# Altium PCB 7Inc Module.PcbDoc (part 1 of 2)
Units mm, origin at the board's own origin, x right, y up, seen from the top; angles counter-clockwise.
Board outline 50 x 50 mm, 4 copper layers (L1, L2, L3, L4), stack 1.57 mm thick; 64 components, 58 nets, 230 pads, 121 vias.
Unrouted connection lines stored in the file: 274.
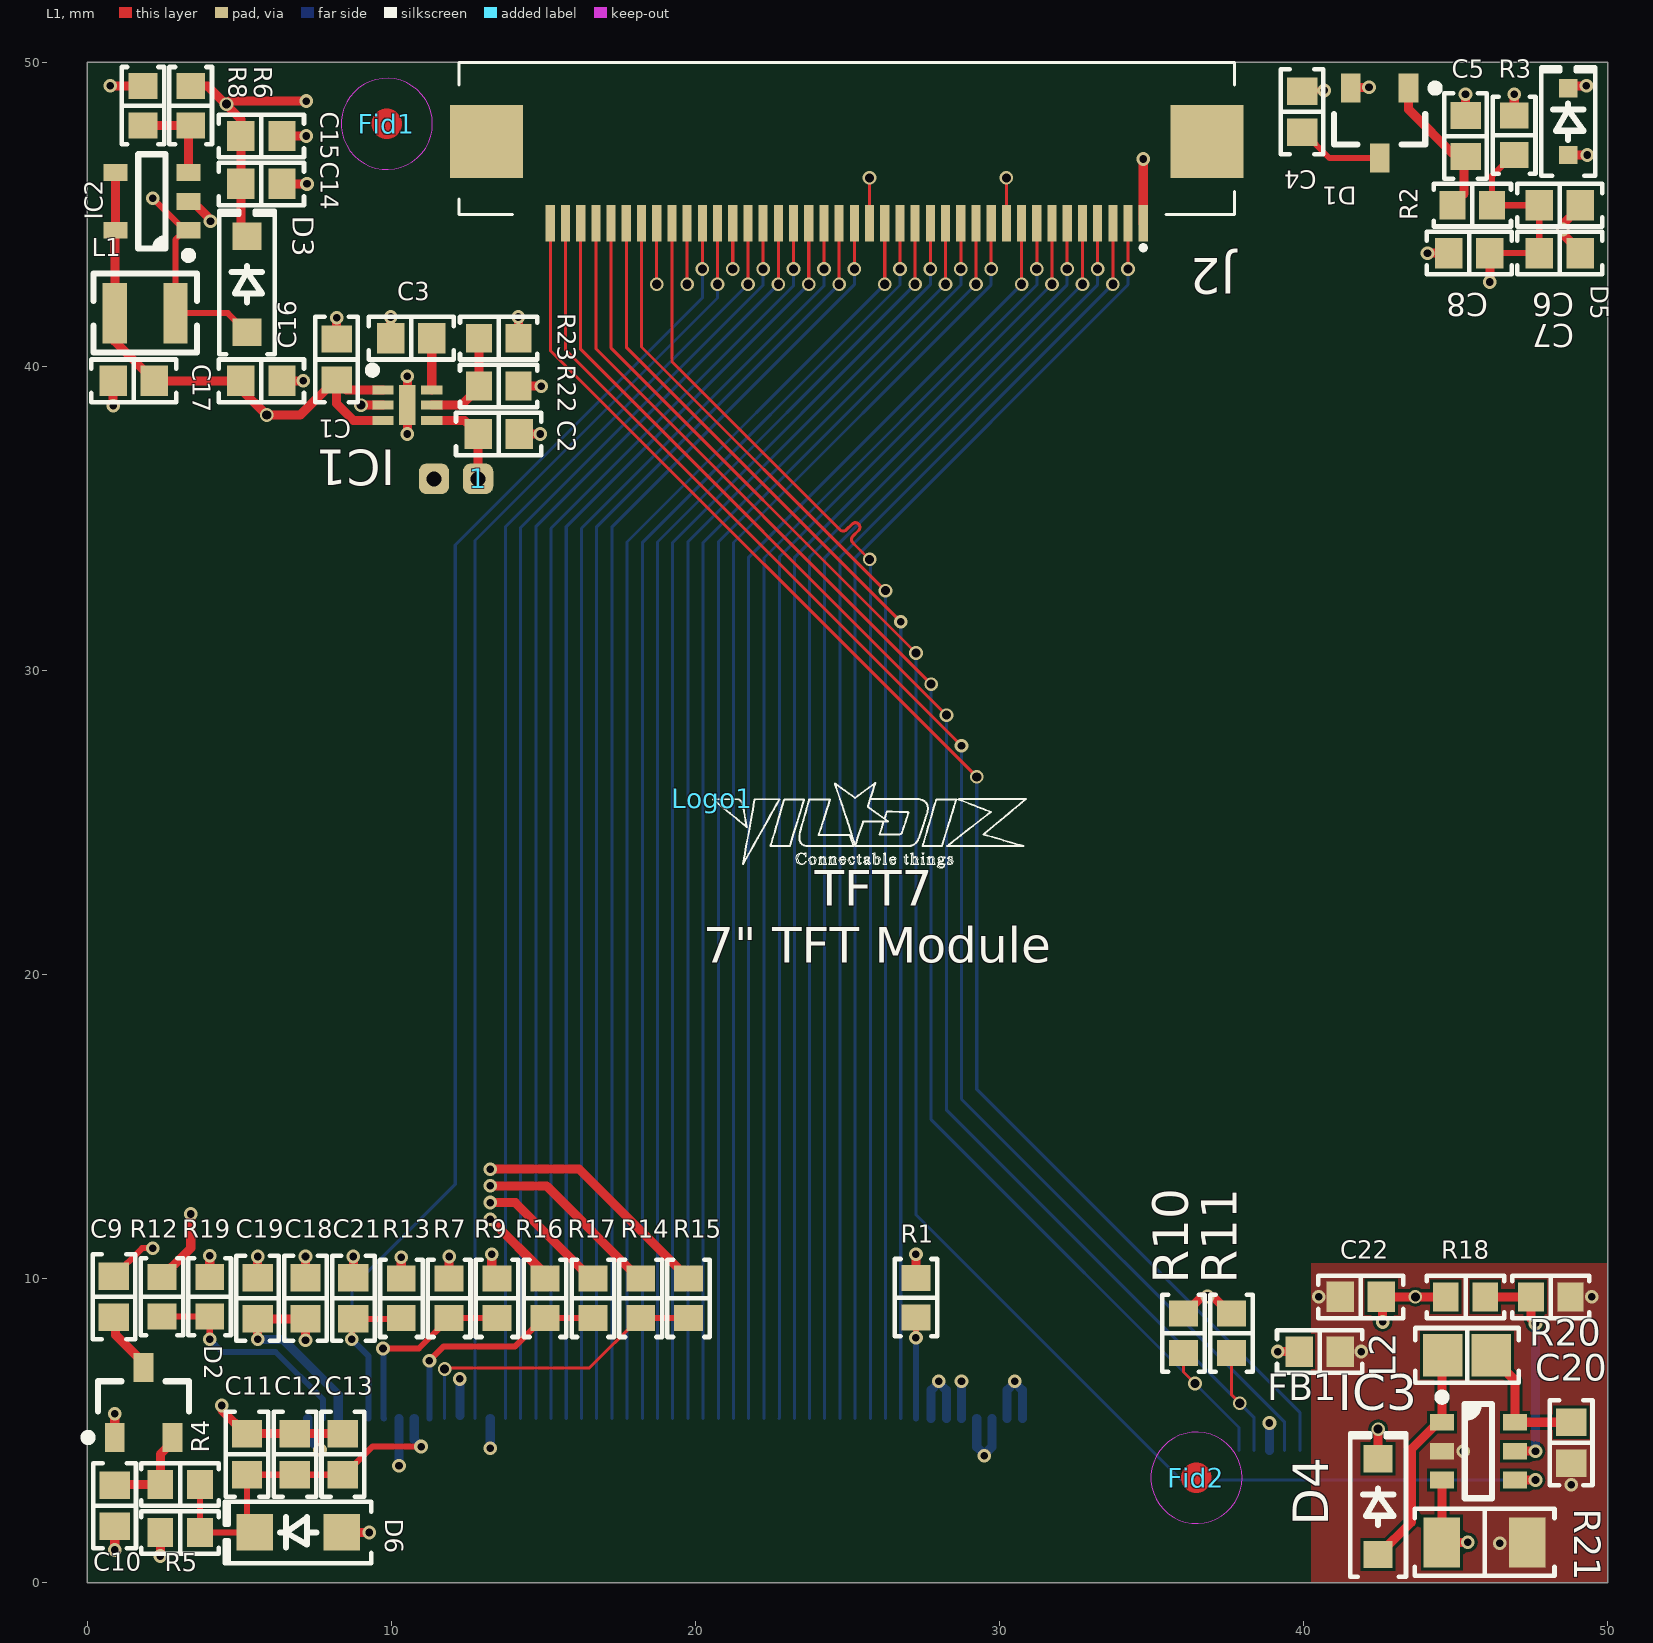
[diagram p0: L1 view]
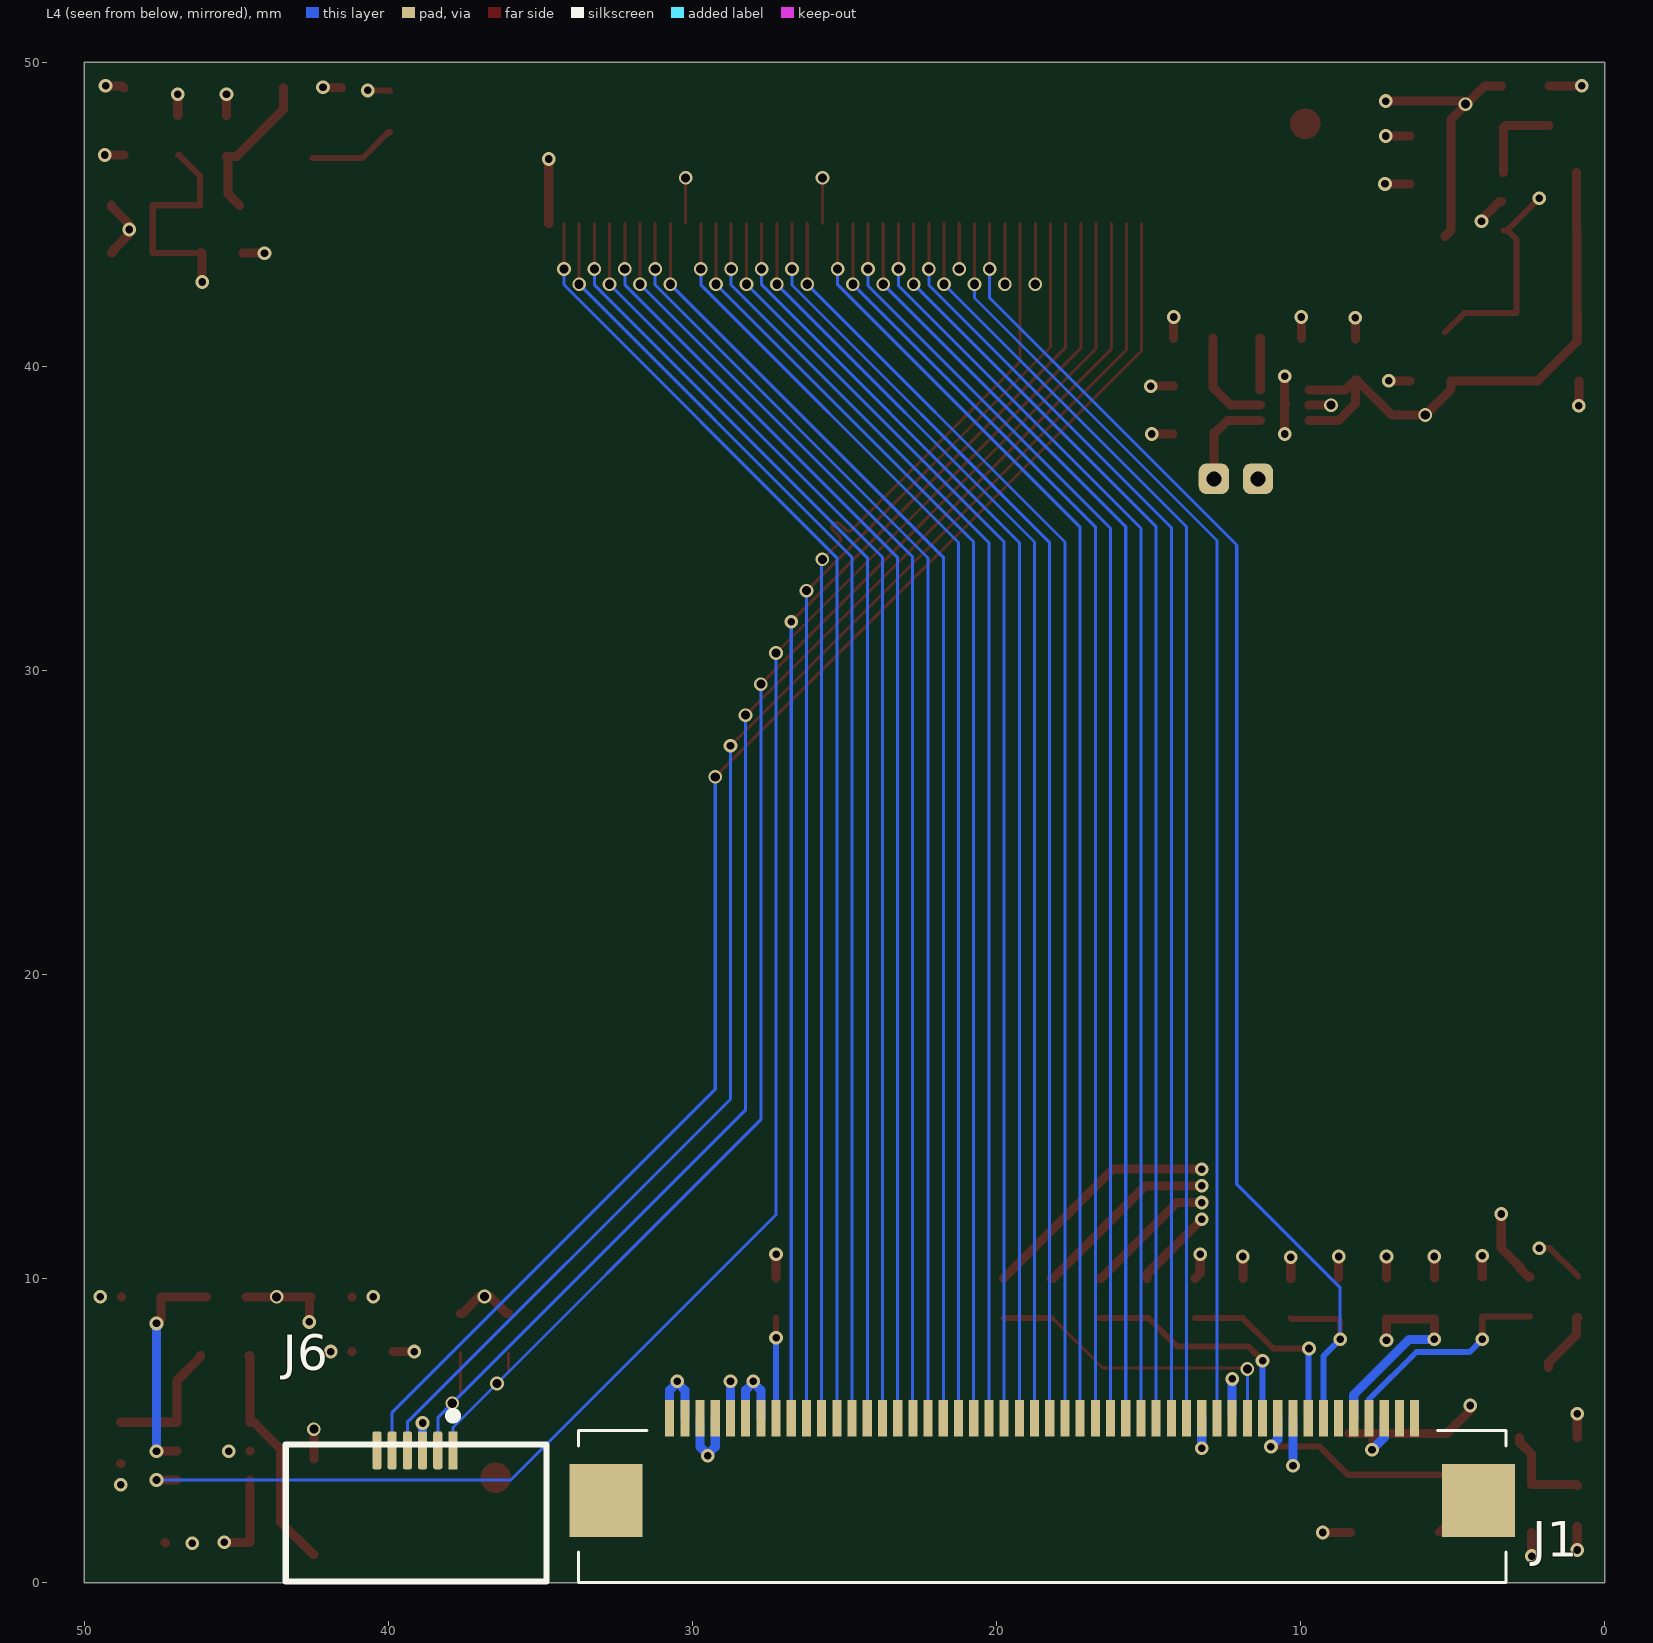
[diagram p1: L4 view, seen from below]
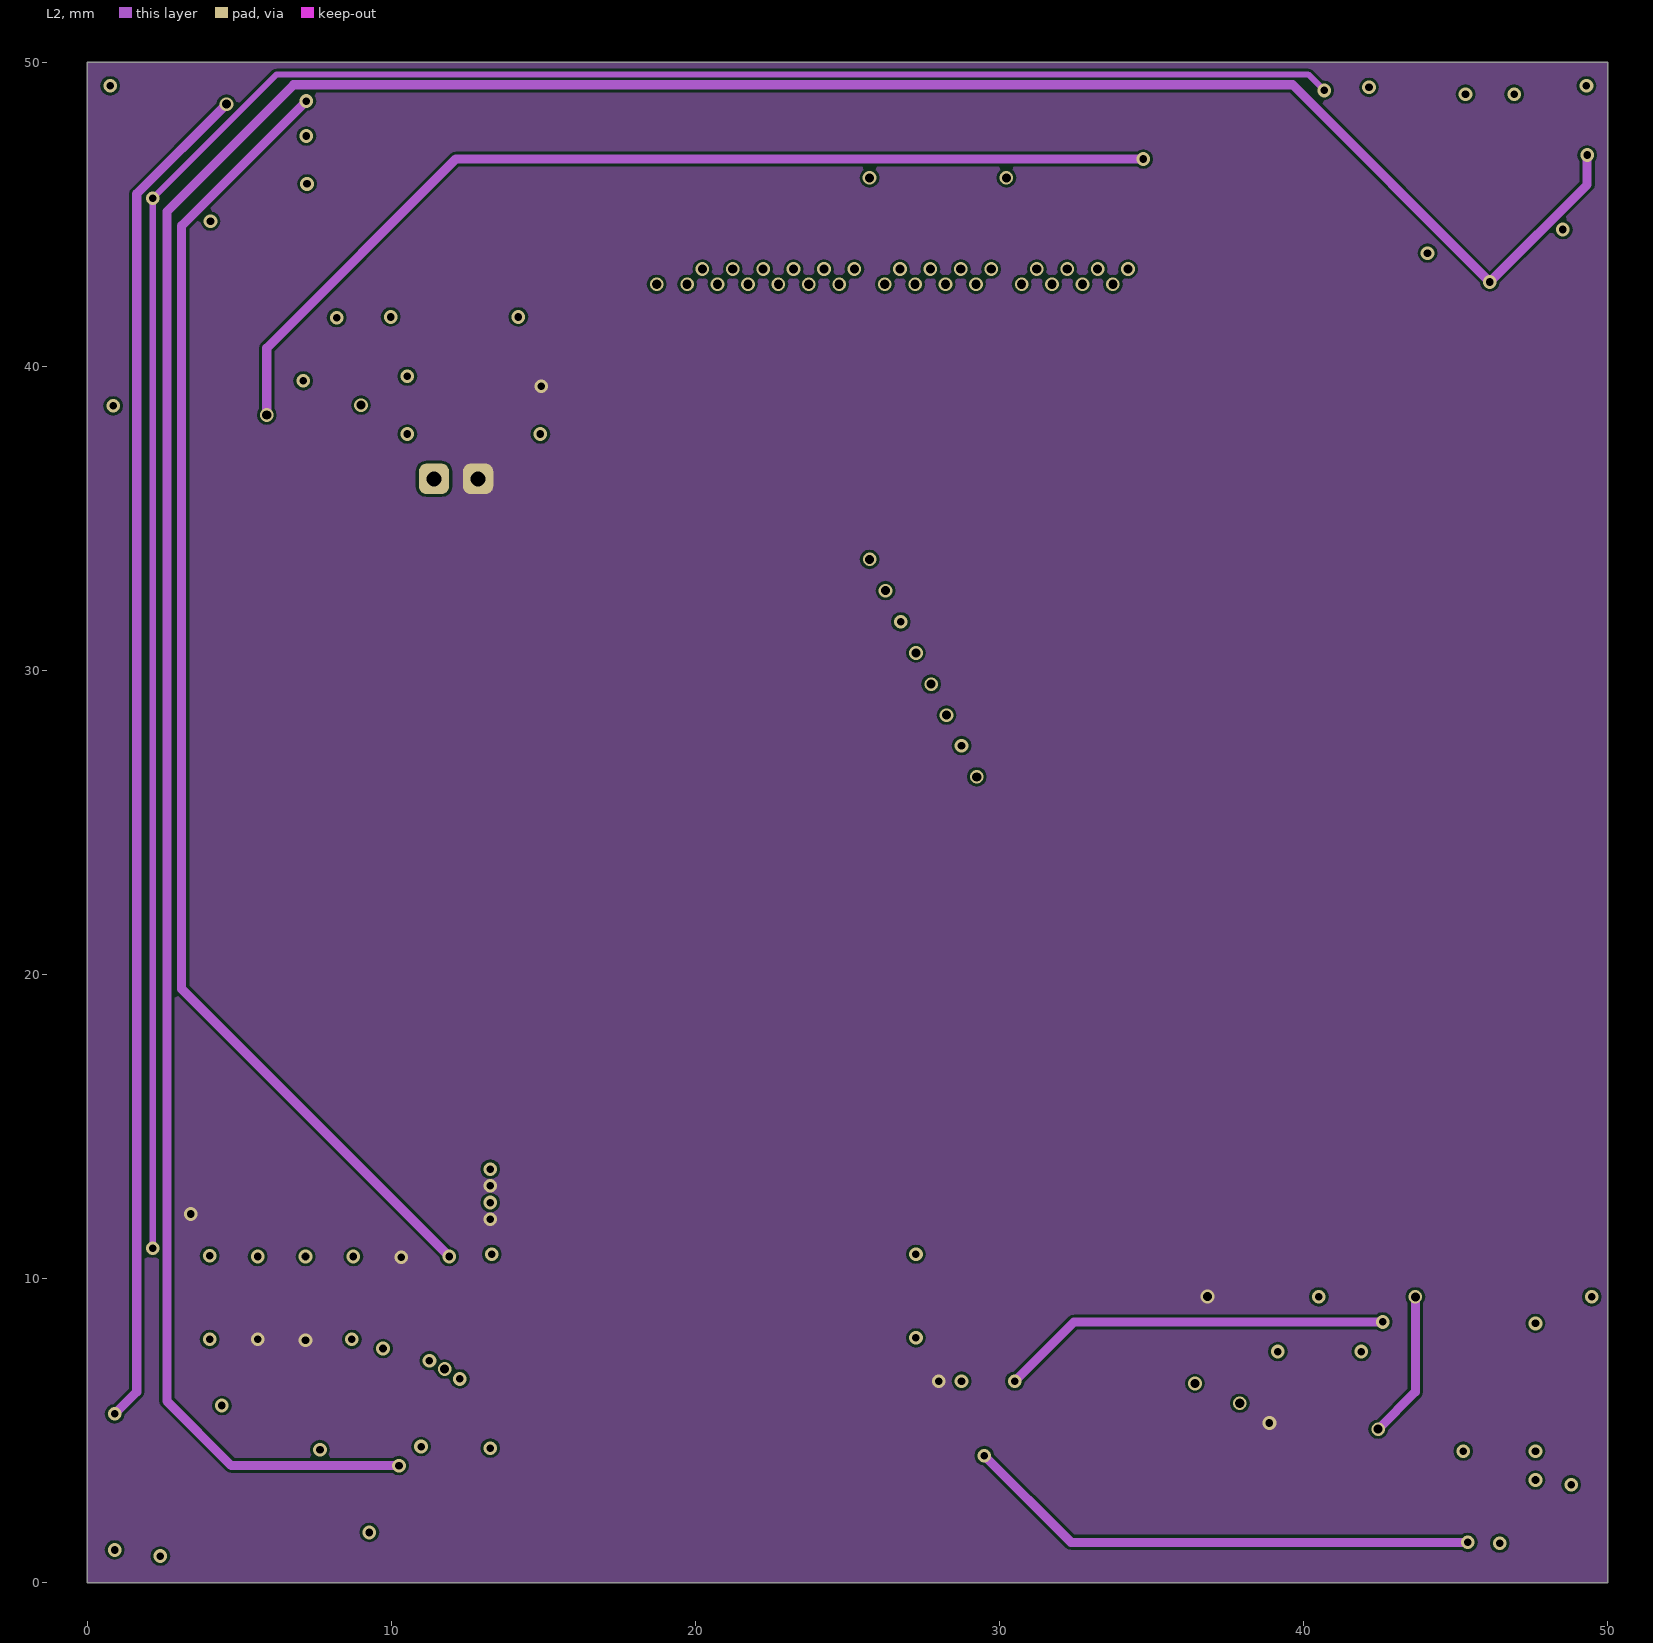
[diagram p2: L2]
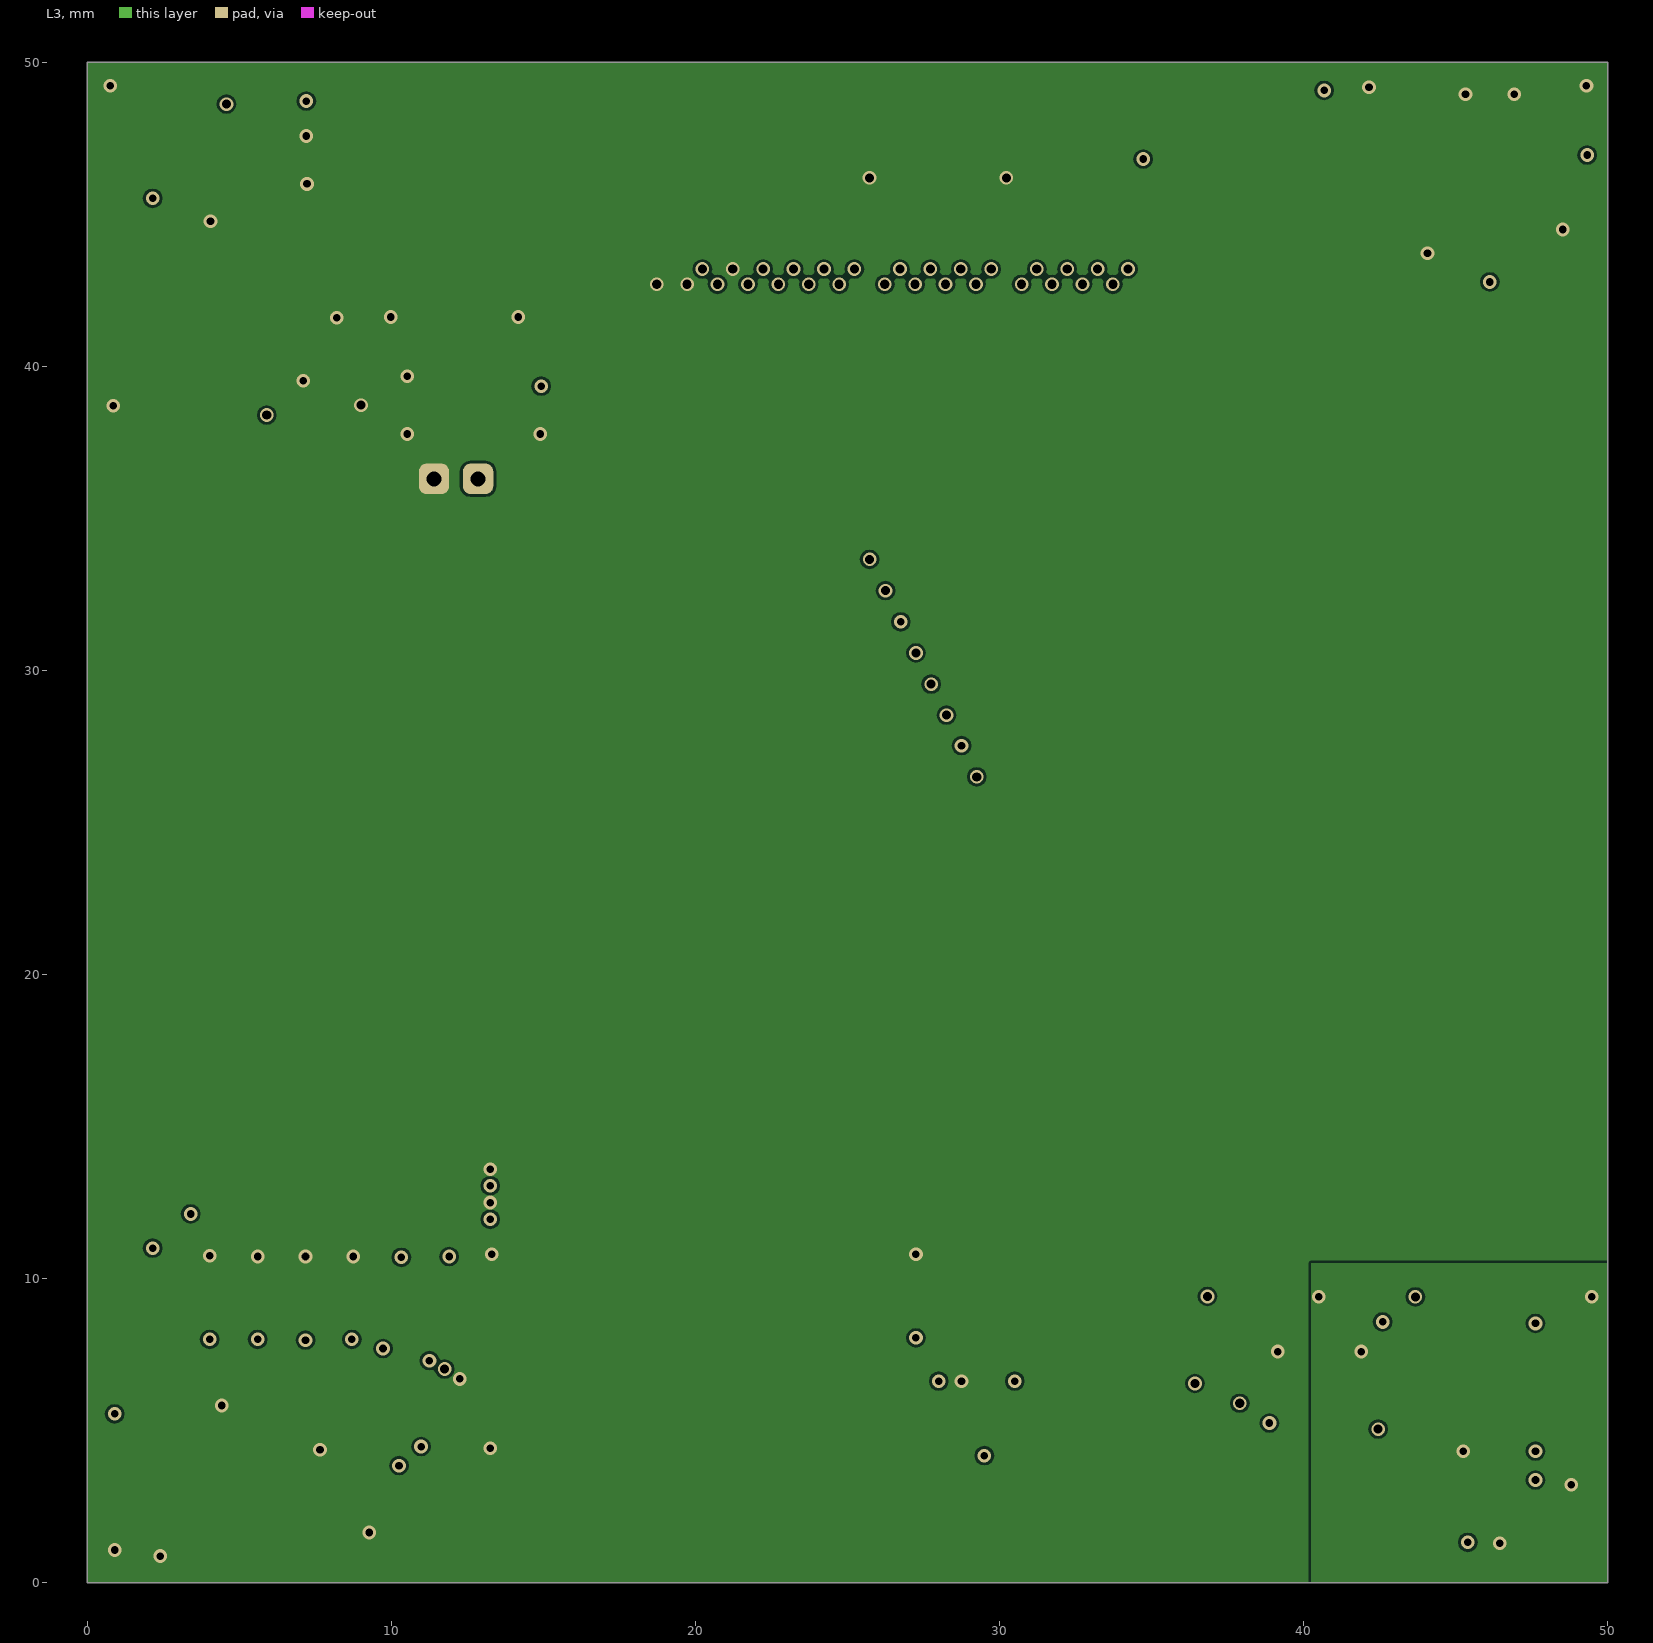
[diagram p3: L3]
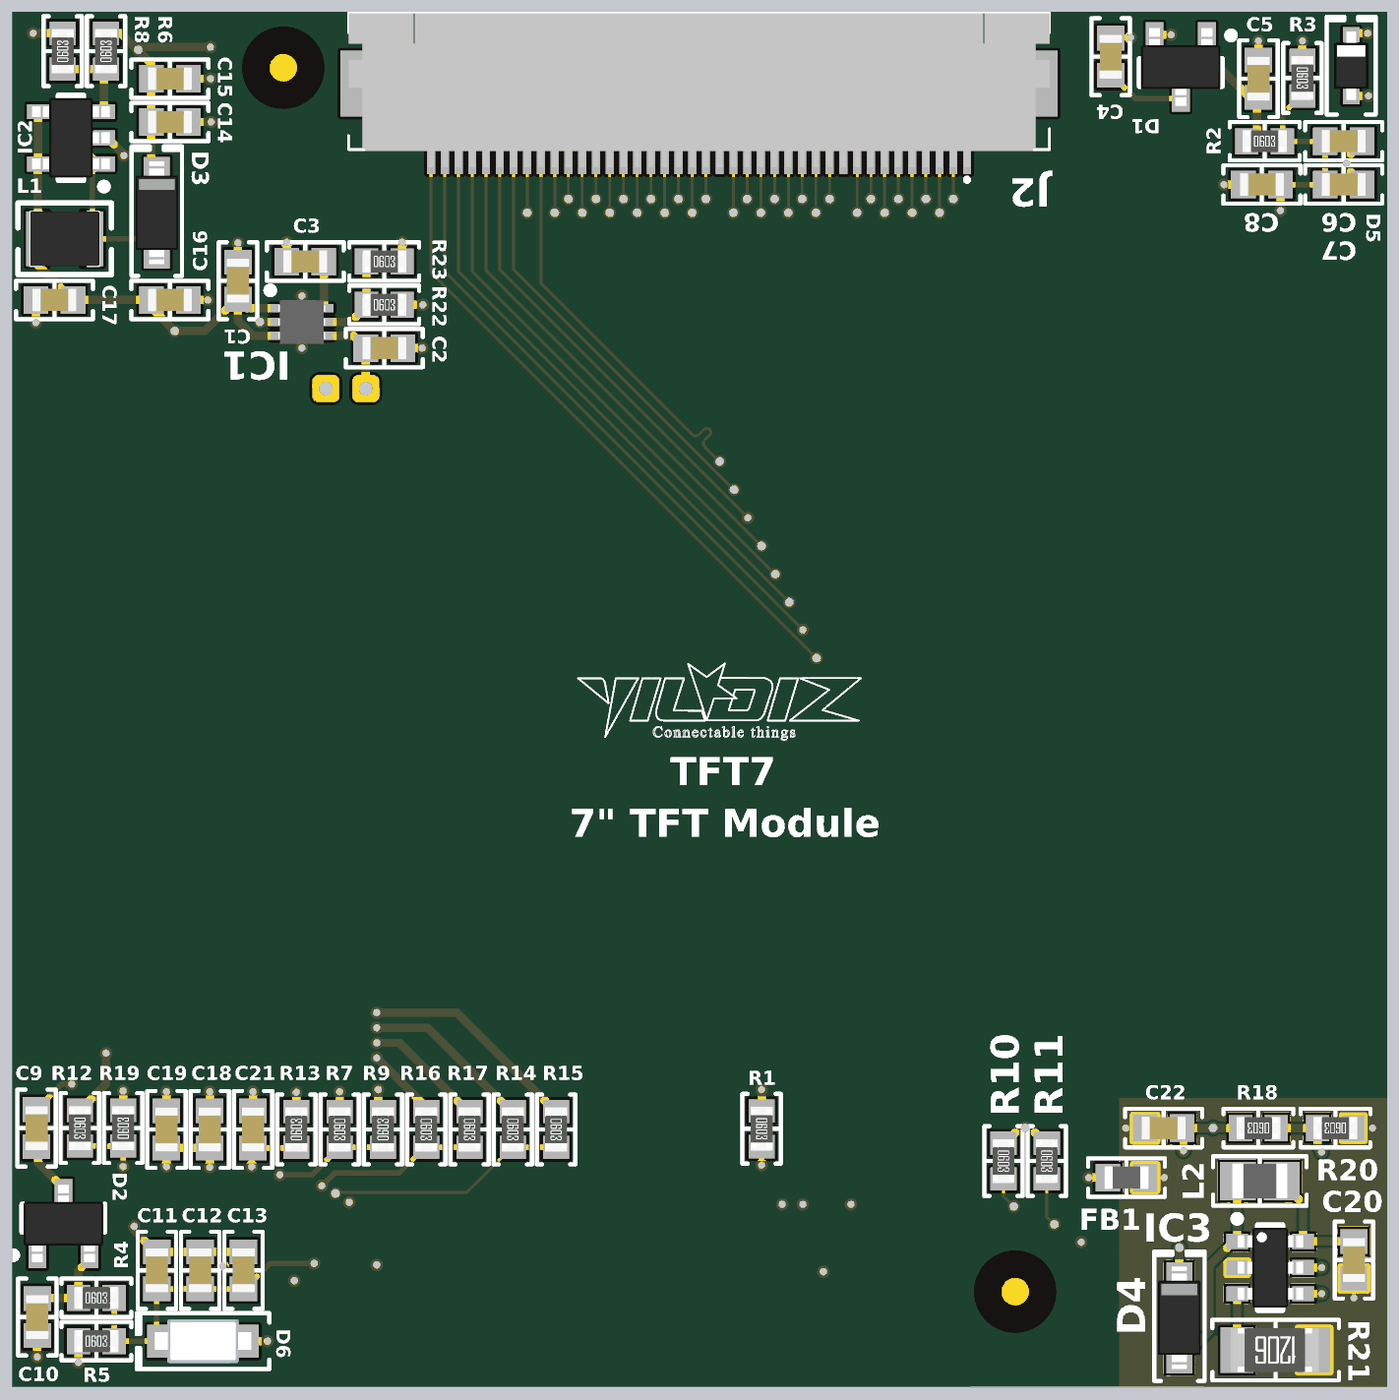
[diagram p4: 3D render of the assembled board from above, using the file's embedded part models]

## Layer stack, top to bottom
Top Solder: solder mask 0.0102, Solder Resist, Dk 3.5
L1: signal copper 0.035
Prepreg 1: prepreg 0.1, 2313, Dk 4.05
L2: signal copper 0.0175
Core: core 1.265, Core-043, Dk 4.3
L3: signal copper 0.0175
Prepreg 2: prepreg 0.1, 2313, Dk 4.05
L4: signal copper 0.035
Bottom Solder: solder mask 0.0102, Solder Resist, Dk 3.5

## Board outline
0,0 0,50 50,50 50,0

## Design rules (kind name [scope] priority, off if disabled: settings)
Clearance [All] p1: gap=0.089 ignorepadtopadclearanceinfootprint=FALSE
ComponentClearance [All] p1: gap=0 collisioncheckmode=3 verticalgap=0 showdistances=FALSE
MatchedLengths "Schematic Matched Net Lengths_3" [InNetClass('LCD_B')] p1: tolerance=2.54 checknetsindiffpair=FALSE checkdiffpairvsdiffpair=TRUE checkxsignals=TRUE checkothers=TRUE
MatchedLengths "Schematic Matched Net Lengths_2" [InNetClass('LCD_CTRL')] p2: tolerance=2.54 checknetsindiffpair=FALSE checkdiffpairvsdiffpair=TRUE checkxsignals=TRUE checkothers=TRUE
MatchedLengths "Schematic Matched Net Lengths_1" [InNetClass('LCD_G')] p3: tolerance=2.54 checknetsindiffpair=FALSE checkdiffpairvsdiffpair=TRUE checkxsignals=TRUE checkothers=TRUE
MatchedLengths "Schematic Matched Net Lengths" [InNetClass('LCD_R')] p4: tolerance=2.54 checknetsindiffpair=FALSE checkdiffpairvsdiffpair=TRUE checkxsignals=TRUE checkothers=TRUE
PolygonConnect [All] p1: connectstyle=Direct reliefconductorwidth=0.254 reliefentries=4 polygonreliefangle="90 Angle" airgapwidth=0.254
RoutingVias [All] p1: holewidth=0.3 width=0.6 viastyle="Through Hole" minholewidth=0.2 minwidth=0.45 maxholewidth=5 maxwidth=5
SolderMaskExpansion [All] p1: expansion=0.102
Width [All] p1: maxlimit=5 minlimit=0.089 preferedwidth=0.2
29 further rules are at their usual default settings.

## Classes and differential pairs
net class R[0..7]: R0 R1 R2 R3 R4 R5 R6 R7
net class LCD_R: R0 R1 R2 R3 R4 R5 R6 R7
net class LCD_G: G0 G1 G2 G3 G4 G5 G6 G7
net class LCD_CTRL: CLK HSYNC VSYNC
net class LCD_B: B0 B1 B2 B3 B4 B5 B6 B7
net class G[0..7]: G0 G1 G2 G3 G4 G5 G6 G7
net class B[0..7]: B0 B1 B2 B3 B4 B5 B6 B7

## Components (designator, comment, footprint, x,y, rotation, side; value= is the part's Value field where it differs from the comment)
1 "Test Point" TestPoint 12.85,36.3 r180 top
C1 "1uF" "CAP 0603/1608" 8.2,40.225 r270 top
C2 "1uF" "CAP 0603/1608" 13.525,37.775 r180 top
C3 "100nF" "CAP 0603/1608" 10.65,40.925 r0 top
C4 "100nF" "CAP 0603/1608" 39.95,48.375 r90 top
C5 "100nF" "CAP 0603/1608" 45.325,47.575 r270 top
C6 "10uF" "CAP 0603/1608" 48.425,45.3 r180 top
C7 "1uF" "CAP 0603/1608" 48.425,43.725 r180 top
C8 "100nF" "CAP 0603/1608" 45.45,43.725 r0 top
C9 "100nF" "CAP 0603/1608" 0.875,9.4 r90 top
C10 "100nF" "CAP 0603/1608" 0.9,2.525 r90 top
C11 "10uF" "CAP 0603/1608" 5.25,4.225 r270 top
C12 "1uF" "CAP 0603/1608" 6.825,4.225 r270 top
C13 "100nF" "CAP 0603/1608" 8.4,4.225 r270 top
C14 "1uF" "CAP 0603/1608" 5.725,46 r180 top
C15 "10uF" "CAP 0603/1608" 5.725,47.575 r180 top
C16 "10uF" "CAP 0603/1608" 5.725,39.525 r180 top
C17 "1uF" "CAP 0603/1608" 1.525,39.525 r0 top
C18 "10uF" "CAP 0603/1608" 7.175,9.35 r270 top
C19 "1uF" "CAP 0603/1608" 5.6,9.35 r270 top
C20 "10uF" "CAP 0603/1608" 48.8,4.6 r90 top
C21 "100nF" "CAP 0603/1608" 8.75,9.35 r270 top
C22 "1uF" "CAP 0603/1608" 41.875,9.4 r0 top
D1 "BAT54S,235" "DIODES SOT-23-3" 42.5,48 r270 top
D2 "BAT54S,235" "DIODES SOT-23-3" 1.85,5.925 r90 top
D3 "1N5819HW-7-F" SOD-123 5.25,42.7 r90 top
D4 "BAT54GWJ" SOD-123 42.45,2.5 r90 top
D5 "DDZ7V5ASF-7" SOD323F 48.7,48.05 r90 top
D6 "PDZ16BGWJ" SOD123F 6.93,1.65 r180 top
FB1 "BLM18PG-121SN1D" "FER 0603/1608" 40.525,7.6 r0 top
Fid1 "Fiducial mark" Fiducial 9.85,47.975 r0 top
Fid2 "Fiducial mark" Fiducial 36.475,3.45 r90 top
IC1 "MIC5353YMT-TR" "MICREL MLF-6 1.6x1.6MM" 10.525,38.725 r0 top
IC2 "AP3012KTR-G1" "DIODES SOT-23-5 W5" 2.125,45.425 r180 top
IC3 "AP3032KTR-G1" "DIODES SOT-23-6 W6" 45.75,4.325 r0 top
J1 "62684-501100ALF" "Amphenol 62684-501100ALF" 18.5,3 r180 bottom locked
J2 "62684-401100ALF" "Amphenol 62684-401100ALF" 25,47.375 r0 top locked
J6 "1734592-6" FPC-6 39.125,4.35 r0 bottom locked
L1 "10uH" "TAIYO YUDEN MAMK2520T1R0M" 1.9,41.75 r0 top
L2 "6.8uH" "FER 0805/2012" 45.375,7.475 r180 top
Logo1 "Logo symbol" LOGO_YILDIZIOT 20.55,25.775 r0 top
R1 "1kR" "RES 0603/1608" 27.25,9.375 r270 top
R2 "13kR" "RES 0603/1608" 45.55,45.3 r0 top
R3 "6.98kR" "RES 0603/1608" 46.925,47.6 r270 top
R4 "1.24kR" "RES 0603/1608" 3.05,3.225 r0 top
R5 "4.99kR" "RES 0603/1608" 3.05,1.65 r0 top
R6 "15kR" "RES 0603/1608" 3.4,48.575 r90 top
R7 "910R" "RES 0603/1608" 11.9,9.35 r270 top
R8 "1kR" "RES 0603/1608" 1.825,48.575 r90 top
R9 "1kR" "RES 0603/1608" 13.475,9.35 r90 top
R10 "1kR" "RES 0603/1608" 36.05,8.2 r270 top
R11 "1kR" "RES 0603/1608" 37.625,8.2 r270 top
R12 "1kR" "RES 0603/1608" 2.45,9.4 r270 top
R13 "1kR" "RES 0603/1608" 10.325,9.35 r90 top
R14 "0mR" "RES 0603/1608" 18.2,9.35 r270 top
R15 "0mR" "RES 0603/1608" 19.775,9.35 r270 top
R16 "0mR" "RES 0603/1608" 15.05,9.35 r270 top
R17 "0mR" "RES 0603/1608" 16.625,9.35 r270 top
R18 "47kR" "RES 0603/1608" 45.325,9.4 r180 top
R19 "1kR" "RES 0603/1608" 4.025,9.4 r90 top
R20 "68kR" "RES 0603/1608" 48.125,9.4 r180 top
R21 "5.6R" "RES 1206/3216" 45.95,1.325 r180 top
R22 "14kR" "RES 0603/1608" 13.525,39.35 r0 top
R23 "10kR" "RES 0603/1608" 13.525,40.925 r0 top

## Footprints (in the part's own frame and the unit in brackets; to place one, negate y for a bottom-side part, rotate by r counter-clockwise, add the part's x,y. Pads: shape width x height; smd on the part's side, far side on the other; paste and mask are expansions set on the pad)
"Amphenol 62684-401100ALF" [mm] "40 way 0.5 pitch FPC Connector"
  rect 0.3x1.2 smd: 1(9.725,-2.675) 2(9.225,-2.675) 3(8.725,-2.675) 4(8.225,-2.675) 5(7.725,-2.675) 6(7.225,-2.675) 7(6.725,-2.675) 8(6.225,-2.675) 9(5.725,-2.675) 10(5.225,-2.675) 11(4.725,-2.675) 12(4.225,-2.675) 13(3.725,-2.675) 14(3.225,-2.675) 15(2.725,-2.675) 16(2.225,-2.675) 17(1.725,-2.675) 18(1.225,-2.675) 19(0.725,-2.675) 20(0.225,-2.675) 21(-0.275,-2.675) 22(-0.775,-2.675) 23(-1.275,-2.675) 24(-1.775,-2.675) 25(-2.275,-2.675) 26(-2.775,-2.675) 27(-3.275,-2.675) 28(-3.775,-2.675) 29(-4.275,-2.675) 30(-4.775,-2.675) 31(-5.275,-2.675) 32(-5.775,-2.675) 33(-6.275,-2.675) 34(-6.775,-2.675) 35(-7.275,-2.675) 36(-7.775,-2.675) 37(-8.275,-2.675) 38(-8.775,-2.675) 39(-9.275,-2.675) 40(-9.775,-2.675)
  rect 2.4x2.4 smd: MP1(11.825,0.025) MP2(-11.875,0.025)
  silkscreen extent -12.77,-3.52 12.73,2.62, body extent -12.77,-3.02 12.73,2.58, height 2
"Amphenol 62684-501100ALF" [mm] "50 way 0.5 pitch FPC Connector"
  rect 0.3x1.2 smd: 1(-12.25,2.4) 2(-11.75,2.4) 3(-11.25,2.4) 4(-10.75,2.4) 5(-10.25,2.4) 6(-9.75,2.4) 7(-9.25,2.4) 8(-8.75,2.4) 9(-8.25,2.4) 10(-7.75,2.4) 11(-7.25,2.4) 12(-6.75,2.4) 13(-6.25,2.4) 14(-5.75,2.4) 15(-5.25,2.4) 16(-4.75,2.4) 17(-4.25,2.4) 18(-3.75,2.4) 19(-3.25,2.4) 20(-2.75,2.4) 21(-2.25,2.4) 22(-1.75,2.4) 23(-1.25,2.4) 24(-0.75,2.4) 25(-0.25,2.4) 26(0.25,2.4) 27(0.75,2.4) 28(1.25,2.4) 29(1.75,2.4) 30(2.25,2.4) 31(2.75,2.4) 32(3.25,2.4) 33(3.75,2.4) 34(4.25,2.4) 35(4.75,2.4) 36(5.25,2.4) 37(5.75,2.4) 38(6.25,2.4) 39(6.75,2.4) 40(7.25,2.4) 41(7.75,2.4) 42(8.25,2.4) 43(8.75,2.4) 44(9.25,2.4) 45(9.75,2.4) 46(10.25,2.4) 47(10.75,2.4) 48(11.25,2.4) 49(11.75,2.4) 50(12.25,2.4)
  rect 2.4x2.4 smd: MP1(-14.35,-0.3) MP2(14.35,-0.3)
  silkscreen extent -15.25,-3 15.25,2, body extent -15.25,-2.5 15.25,3.14, height 2.05
"CAP 0603/1608" [mm] "Chip Capacitor, 2-Leads, Body 1.60x0.80mm, IPC Medium Density"
  rect 0.9x1 smd: 1(-0.675,0) 2(0.675,0)
  silkscreen extent -1.4,-0.7 1.4,0.7, body extent -0.8,-0.41 0.8,0.41, height 0.82
"DIODES SOT-23-3" [mm] "SOT23, 3-Leads, Body 2.90x2.40mm, Pitch 0.95mm, IPC Medium Density"
  rect 0.95x0.65 smd: 1(-1.15,0.95) 2(1.15,0) 3(-1.15,-0.95)
  silkscreen extent -1.27,-1.5 0.7,1.95, body extent -1.41,-1.45 1.41,1.45, height 1.5
"DIODES SOT-23-5 W5" [mm] "SOT23, 5-Leads, Body 3.00x2.85mm, Pitch 0.95mm, IPC Medium Density"
  rect 0.8x0.55 smd: 1(-1.2,0.95) 2(-1.2,0) 3(-1.2,-0.95) 4(1.2,-0.95) 5(1.2,0.95)
  silkscreen extent -1.33,-1.55 0.45,1.9, body extent -1.41,-1.45 1.41,1.45, height 1.5
"DIODES SOT-23-6 W6" [mm] "SOT23, 6-Leads, Body 3.00x2.85mm, Pitch 0.95mm, IPC Medium Density"
  rect 0.8x0.55 smd: 1(-1.2,0.95) 2(-1.2,0) 3(-1.2,-0.95) 4(1.2,-0.95) 5(1.2,0) 6(1.2,0.95)
  silkscreen extent -1.32,-1.55 0.45,1.9, body extent -1.19,-1.45 1.2,1.45, height 1
"FER 0603/1608" [mm] "Chip Ferrite, 2-Leads, Body 1.60x0.80mm, IPC Medium Density"
  rect 0.9x1 smd: 1(-0.675,0) 2(0.675,0)
  silkscreen extent -1.4,-0.7 1.4,0.7, body extent -0.8,-0.41 0.8,0.41, height 0.82
"FER 0805/2012" [mm] "Chip Ferrite, 2-Leads, Body 2.00x1.20mm, IPC Medium Density"
  rect 1.3x1.4 smd: 1(-0.8,0) 2(0.8,0)
  silkscreen extent -1.7,-0.9 1.7,0.9, body extent -1,-0.64 1,0.64, height 1.26
Fiducial [mm] "Electrolitic Radial Capacitor, 5mm pin space, 0.8mm Hole, 10.1mm diametre, 15.2 height"
  L1 circle w1: c0,0 r0
  L1 keep-out circle w0.01: c0,0 r1.5
FPC-6 [mm] "6 way 0.5 pitch FPC Connector"
  rect 0.3x1.25 smd: 1(-1.25,0)
  rrect50% 0.3x1.25 smd: 2(-0.75,0) 3(-0.25,0) 4(0.25,0) 5(0.75,0) 6(1.25,0)
  silkscreen extent -4.33,-1.15 4.25,4.31, body extent -4.27,-0.5 4.23,4.4, height 1.82
LOGO_YILDIZIOT [mm] "YýLDýZ IoT Logo"
  silkscreen extent 0.02,-2.27 10.31,0.53
"MICREL MLF-6 1.6x1.6MM" [mm] "6-UFDFN Exposed Pad, 6-TMLF®"
  rect 0.7x0.3 smd: 1(-0.8,0.5) 2(-0.8,0) 3(-0.8,-0.5) 4(0.8,-0.5) 5(0.8,0) 6(0.8,0.5)
  rect 0.55x1.31 smd: 7(0,0)
  silkscreen extent -1.27,1.03 -1.02,1.27, body extent -0.85,-0.8 0.85,0.8, height 0.6
"RES 0603/1608" [mm] "Chip Resistor, 2-Leads, Body 1.60x0.80mm, IPC Medium Density"
  rect 0.85x0.95 smd: 1(-0.65,0) 2(0.65,0)
  silkscreen extent -1.27,-0.7 1.27,0.7, body extent -0.8,-0.4 0.8,0.4, height 0.45
"RES 1206/3216" [mm] "Chip Resistor, 2-Leads, Body 3.13x1.55mm, IPC Medium Density"
  rect 1.2x1.65 smd: 1(-1.4,0) 2(1.4,0)
  silkscreen extent -2.3,-1.1 2.3,1.1, body extent -1.57,-0.8 1.62,0.8, height 0.6
SOD123F [mm] "SODFL, 2-Leads, Body 1.60x3.50mm, IPC Medium Density"
  rect 1.2x1.2 smd: 1(-1.43,0) 2(1.43,0)
  silkscreen extent -2.41,-1.02 2.41,1.02, body extent -1.75,-0.8 1.75,0.8, height 1.1
SOD323F [mm] "SODFL, 2-Leads, Body 1.25x2.50mm, IPC Medium Density"
  rect 0.6x0.6 smd: 1(-1.1,0) 2(1.1,0)
  silkscreen extent -1.78,-0.89 1.78,0.89, body extent -1.25,-0.62 1.25,0.63, height 0.8
SOD-123 [mm] "SOD, 2-Leads, Body 1.55x3.70mm, IPC Medium Density"
  rect 0.9x0.95 smd: 1(-1.575,0) 2(1.575,0)
  silkscreen extent -2.3,-0.92 2.41,0.92, body extent -1.86,-0.78 1.86,0.77, height 1.35
"TAIYO YUDEN MAMK2520T1R0M" [mm] "Inductor, 2-Leads, Body 2.50x2.00mm, IPC Medium Density"
  rect 0.8x2 smd: 1(-1,0) 2(1,0)
  silkscreen extent -1.7,-1.3 1.7,1.3, body extent -1.3,-1.02 1.3,1.03, height 1.2
TestPoint [mm] "Custom Test Point"
  rrect50% 1x1 hole 0.5: 1(0,0)

## Part data
1: "Custom Test Point"
C1 C2 C7 C12 C14 C17 C19: library part "Capacitor - Ceramic", "Ceramic, SMT Capacitor", Case/Package=0603, Case Code (Metric)=1608, Dielectric=X5R, Manufacturer=Samsung, Manufacturer Part Number=CL10A105KP8NNNC, Max Operating Temperature=85°C, Min Operating Temperature=-55°C, Package Quantity=1, Supplier Part Number 1=1276-1182-1-ND, Tolerance=10%, Voltage=10V, Capacitance=1uF, Case Code (Imperial)=0603, ComponentLink1Description=https://datasheet.ciiva.com/15195/getdatasheetpartid-358616-15195708.pdf?src-supplier=Verical, ComponentLink1URL=https://datasheet.ciiva.com/15195/getdatasheetpartid-358616-15195708.pdf?src-supplier=Verical, ComponentLink2Description=https://datasheet.ciiva.com/16358/cl05b104kq5nnnc-16358431.pdf?src-supplier=Future+Electronics, ComponentLink2URL=https://datasheet.ciiva.com/16358/cl05b104kq5nnnc-16358431.pdf?src-supplier=Future+Electronics, Contact Plating=Tin, Depth=0.8mm, Height=0.8mm, Length=1.6mm, Mount="Surface Mount", Packaging="Tape and Reel", Pricing 1="1 = 0,10000, 10 = 0,03800, 100 = 0,01680, 500 = 0,01200, 1000 = 0,00943 (USD)", Radiation Hardening=No, RoHS=Yes, Stock 1=4590831, Supplier 1=Digi-Key, Thickness=0.035inch, Voltage Rating=10V, Width=0.031inch
C3 C4 C5 C9 C10 C21: library part "Cap - Ceramic", "Capacitor, Ceramic", Case/Package=0603, Case Code (Metric)=1608, Dielectric=X5R, Manufacturer=Samsung, Manufacturer Part Number=CL10A104KA8NNNC, Max Operating Temperature=85°C, Min Operating Temperature=-55°C, Package Quantity=1, Supplier Part Number 1=1276-1857-1-ND, Tolerance=10%, Voltage Rating=25V, Capacitance=100nF, Case Code (Imperial)=0603, ComponentLink1Description=http://www.samsungsem.com/kr/support/library/product-catalog/mlcc.jsp, ComponentLink1URL=http://www.samsungsem.com/kr/support/library/product-catalog/mlcc.jsp, Contact Plating=Tin, Lead Free="Lead Free", Length=0.063inch, Mount="Surface Mount", Packaging="Tape and Reel", Price=0,1, Pricing 1="1 = 0,10000, 10 = 0,04600, 100 = 0,02070, 500 = 0,01478, 1000 = 0,01162 (USD)", RoHS=Yes, Stock 1=978306, Supplier 1=Digi-Key, Termination=Wraparound, Thickness=0.035inch, Voltage Rating (DC)=25V, Width=0.031inch
C6 C11 C15 C16 C18 C20: library part "Capacitor - Ceramic", "Ceramic, SMT Capacitor", Case/Package=0603, Case Code (Metric)=1608, Dielectric=X5R, Manufacturer=Samsung, Manufacturer Part Number=CL10A106MQ8NNNC, Max Operating Temperature=85°C, Min Operating Temperature=-55°C, Package Quantity=1, Supplier Part Number 1=1276-1119-1-ND, Tolerance=20%, Voltage=6.3V, Capacitance=10uF, Case Code (Imperial)=0603, ComponentLink1Description=https://datasheet.ciiva.com/25798/cl10a106mq8nnnc-25798320.pdf?src-supplier=Digi-Key, ComponentLink1URL=https://datasheet.ciiva.com/25798/cl10a106mq8nnnc-25798320.pdf?src-supplier=Digi-Key, ComponentLink2Description=https://datasheet.ciiva.com/26838/getdatasheetpartid-357557-26838347.pdf?src-supplier=Verical, ComponentLink2URL=https://datasheet.ciiva.com/26838/getdatasheetpartid-357557-26838347.pdf?src-supplier=Verical, ComponentLink3Description=https://datasheet.ciiva.com/16437/cl05b104kq5nnnc-16437327.pdf?src-supplier=Future+Electronics, ComponentLink3URL=https://datasheet.ciiva.com/16437/cl05b104kq5nnnc-16437327.pdf?src-supplier=Future+Electronics, Contact Plating=Tin, Depth=0.8mm, Height=0.8mm, Length=1.6mm, Mount="Surface Mount", Packaging="Tape and Reel", Pricing 1="1 = 0,15000, 10 = 0,11000, 100 = 0,05150, 500 = 0,03614, 1000 = 0,02992 (USD)", Radiation Hardening=No, RoHS=Yes, Stock 1=4408315, Supplier 1=Digi-Key, Thickness=0.035inch, Voltage Rating=6.3V, Width=0.031inch
C8 C13: library part "Capacitor - Ceramic", "Ceramic, SMT Capacitor", Case/Package=0603, Case Code (Metric)=1608, Dielectric=X5R, Manufacturer=Samsung, Manufacturer Part Number=CL10A104KA8NNNC, Max Operating Temperature=85°C, Min Operating Temperature=-55°C, Package Quantity=1, Supplier Part Number 1=1276-1857-1-ND, Tolerance=10%, Voltage Rating=25V, Capacitance=100nF, Case Code (Imperial)=0603, ComponentLink1Description=https://datasheet.ciiva.com/15195/getdatasheetpartid-358616-15195708.pdf?src-supplier=Verical, ComponentLink1URL=https://datasheet.ciiva.com/15195/getdatasheetpartid-358616-15195708.pdf?src-supplier=Verical, ComponentLink2Description=https://datasheet.ciiva.com/16358/cl05b104kq5nnnc-16358431.pdf?src-supplier=Future+Electronics, ComponentLink2URL=https://datasheet.ciiva.com/16358/cl05b104kq5nnnc-16358431.pdf?src-supplier=Future+Electronics, ComponentLink3Description=https://datasheet.ciiva.com/25780/cl10a104ka8nnnc-25780966.pdf?src-supplier=Digi-Key, ComponentLink3URL=https://datasheet.ciiva.com/25780/cl10a104ka8nnnc-25780966.pdf?src-supplier=Digi-Key, Contact Plating=Tin, Lead Free="Lead Free", Length=0.063inch, Mount="Surface Mount", Packaging="Tape and Reel", Pricing 1="1 = 0,10000, 10 = 0,04500, 100 = 0,02000, 500 = 0,01428, 1000 = 0,01122 (USD)", RoHS=Yes, Stock 1=1217365, Supplier 1=Digi-Key, Termination=Wraparound, Thickness=0.035inch, Voltage Rating (DC)=25V, Width=0.031inch
C22: library part "Capacitor - Ceramic", "Ceramic, SMT Capacitor", Case/Package=0603, Case Code (Metric)=1608, Dielectric=X5R, Manufacturer=Samsung, Manufacturer Part Number=CL10A105KO8NNNC, Max Operating Temperature=85°C, Min Operating Temperature=-55°C, Package Quantity=1, Supplier Part Number 1=1276-1034-1-ND, Tolerance=10%, Voltage=16V, Capacitance=1uF, Case Code (Imperial)=0603, ComponentLink1Description=http://www1.futureelectronics.com/doc/SAMSUNG/CL10A105KO8NNNC.pdf?src-supplier=Future+Electronics, ComponentLink1URL=http://www1.futureelectronics.com/doc/SAMSUNG/CL10A105KO8NNNC.pdf?src-supplier=Future+Electronics, ComponentLink2Description=https://www.verical.com/server-webapp/html/getDatasheet?partID=359688&src-supplier=Verical, ComponentLink2URL=https://www.verical.com/server-webapp/html/getDatasheet?partID=359688&src-supplier=Verical, ComponentLink3Description=https://produktinfo.conrad.com/datenblaetter/450000-474999/458190-da-01-en-VS_KONDENSATOR_0603.pdf?src-supplier=Conrad, ComponentLink3URL=https://produktinfo.conrad.com/datenblaetter/450000-474999/458190-da-01-en-VS_KONDENSATOR_0603.pdf?src-supplier=Conrad, Contact Plating=Tin, Depth=0.8mm, Height=0.8mm, Lead Free="Lead Free", Length=1.6mm, Material=Ceramic, Mount="Surface Mount", Packaging="Tape and Reel", Pricing 1="1 = 0,10000, 10 = 0,03800, 100 = 0,01680, 500 = 0,01198, 1000 = 0,00941 (USD)", Radiation Hardening=No, RoHS=Yes, Stock 1=800480, Supplier 1=Digi-Key, Thickness=0.035inch, Voltage Rating=16V, Voltage Rating (DC)=16V, Width=0.031inch
D1 D2: library part "Diode Schottky Barier Array", "TVS Array", Manufacturer=Nexperia, Supplier Part Number 1=1727-1868-1-ND, ComponentLink1Description=https://assets.nexperia.com/documents/data-sheet/BAT54_SER.pdf?src-supplier=Digi-Key, ComponentLink1URL=https://assets.nexperia.com/documents/data-sheet/BAT54_SER.pdf?src-supplier=Digi-Key, ComponentLink2Description=SMD, Manufacturer Part Number=BAT54S,235, Pricing 1="1 = 0,14000, 10 = 0,12500, 25 = 0,11880, 100 = 0,05230, 250 = 0,05016, 500 = 0,04104, 1000 = 0,02850, 2500 = 0,02489, 5000 = 0,02233 (USD)", RoHS=No, Stock 1=9232, Supplier 1=Digi-Key
D3: library part "Diode Schottky", "Zener Diode", Average Rectified Current=1A, Capacitance=110pF, Case/Package=SOD-123-2, Forward Voltage=450mV, Manufacturer=Diodes, Max Forward Surge Current (Ifsm)=25A, Max Operating Temperature=125°C, Max Power Dissipation=450mW, Max Repetitive Reverse Voltage (Vrrm)=40V, Min Operating Temperature=-65°C, Package Quantity=3000, Peak Reverse Current=50uA, Supplier Part Number 1=1N5819HW-FDICT-ND, ComponentLink1Description=https://datasheet.ciiva.com/16303/ds30217-16303296.pdf?src-supplier=Future+Electronics, ComponentLink1URL=https://datasheet.ciiva.com/16303/ds30217-16303296.pdf?src-supplier=Future+Electronics, ComponentLink2Description=https://datasheet.ciiva.com/27092/1538419-27092484.pdf?src-supplier=Jameco, ComponentLink2URL=https://datasheet.ciiva.com/27092/1538419-27092484.pdf?src-supplier=Jameco, ComponentLink3Description=https://datasheet.ciiva.com/912/ds30217-912801.pdf?src-supplier=Digi-Key, ComponentLink3URL=https://datasheet.ciiva.com/912/ds30217-912801.pdf?src-supplier=Digi-Key, ComponentLink4Description=https://datasheet.ciiva.com/912/ds30217-912803.pdf?src-supplier=Digi-Key, ComponentLink4URL=https://datasheet.ciiva.com/912/ds30217-912803.pdf?src-supplier=Digi-Key, ComponentLink5Description=https://datasheet.ciiva.com/8303/ds30217-8303132.pdf?src-supplier=Avnet, ComponentLink5URL=https://datasheet.ciiva.com/8303/ds30217-8303132.pdf?src-supplier=Avnet, ComponentLink6Description=https://datasheet.ciiva.com/25919/ds30217-25919644.pdf?src-supplier=Avnet+Europe, ComponentLink6URL=https://datasheet.ciiva.com/25919/ds30217-25919644.pdf?src-supplier=Avnet+Europe, ComponentLink7Description=https://datasheet.ciiva.com/1177/ds30217-1177089.pdf?src-supplier=Element14, ComponentLink7URL=https://datasheet.ciiva.com/1177/ds30217-1177089.pdf?src-supplier=Element14, ComponentLink8Description=https://datasheet.ciiva.com/912/ds30217-912802.pdf?src-supplier=Digi-Key, ComponentLink8URL=https://datasheet.ciiva.com/912/ds30217-912802.pdf?src-supplier=Digi-Key, Contact Plating=Tin,Matte, Current Rating=1A, Element Configuration=Single, Forward Current=1A, Height=1.25mm, Lead Free="Lead Free", Length=2.85mm, Manufacturer Part Number=1N5819HW-7-F, Max Reverse Voltage (DC)=40V, Number of Pins=2, Output Current=1A, Packaging="Tape and Reel", Peak Non-Repetitive Surge Current=25A, Polarity=Standard, Pricing 1="1 = 0,40000, 10 = 0,30100, 25 = 0,26360, 100 = 0,14310, 250 = 0,14240, 500 = 0,11678, 1000 = 0,08664 (USD)", Radiation Hardening=No, REACH SVHC="No SVHC", RoHS=Yes, Stock 1=392857, Supplier 1=Digi-Key, Termination=SMD/SMT, Voltage Rating (DC)=40V, Weight=0.000353oz, Width=1.7mm
D4: library part "Diode Schottky", "Zener Diode", Manufacturer="NXP Semiconductors", Supplier Part Number 1=1727-7328-1-ND, Manufacturer Part Number=BAT54GWJ, Pricing 1="1 = 0,14000, 10 = 0,13100, 100 = 0,07140, 500 = 0,04396, 1000 = 0,02997 (USD)", Stock 1=35357, Supplier 1=Digi-Key
D5: library part "Diode Zener", "Zener Diode", Forward Voltage=900mV, Manufacturer=Diodes, Max Operating Temperature=150°C, Max Power Dissipation=500mW, Max Reverse Leakage Current=7.5uA, Min Operating Temperature=-65°C, Package Quantity=3000, Supplier Part Number 1=DDZ7V5ASF-7DICT-ND, Test Current=20mA, Tolerance=3%, Voltage Tolerance=2.63%, Zener Voltage=7.04V, ComponentLink1Description=https://datasheet.ciiva.com/30478/0900766b8115c2de-30478492.pdf?src-supplier=RSComponents, ComponentLink1URL=https://datasheet.ciiva.com/30478/0900766b8115c2de-30478492.pdf?src-supplier=RSComponents, ComponentLink2Description=https://datasheet.ciiva.com/13079/ds31987-65362-13079116.pdf?src-supplier=Mouser, ComponentLink2URL=https://datasheet.ciiva.com/13079/ds31987-65362-13079116.pdf?src-supplier=Mouser, Element Configuration=Single, Height=0.75mm, Impedance=30R, Lead Free="Lead Free", Length=2.5mm, Manufacturer Part Number=DDZ7V5ASF-7, Mount="Surface Mount", Number of Pins=2, Packaging="Tape and Reel", Peak Reverse Current=7.5uA, Power Rating=500mW, Pricing 1="1 = 0,15000, 10 = 0,14100, 25 = 0,13400, 100 = 0,05890, 250 = 0,05656, 500 = 0,04626, 1000 = 0,03213 (USD)", Radiation Hardening=No, REACH SVHC="No SVHC", RoHS=Yes, Stock 1=16, Supplier 1=Digi-Key, Width=1.25mm, Zener Current=7.5uA
D6: library part "Diode Zener", "Zener Diode", Manufacturer=Nexperia, Supplier Part Number 1=1727-7765-1-ND, Manufacturer Part Number=PDZ16BGWJ, Pricing 1="1 = 0,17000, 10 = 0,15400, 25 = 0,14640, 100 = 0,06440, 250 = 0,06176, 500 = 0,05054, 1000 = 0,03510, 2500 = 0,03066, 5000 = 0,02750 (USD)", RoHS=No, Stock 1=19182, Supplier 1=Digi-Key
FB1: library part "Ferrite Chip", "SMT Ferrite Chip", Case/Package=0603, Case Code (Metric)=1608, Current Rating=2A, DC Resistance (DCR)=50mR, Frequency=100MHz, Manufacturer=Murata, Max Operating Temperature=125°C, Min Operating Temperature=-55°C, Package Quantity=1, Supplier Part Number 1=490-1037-1-ND, Tolerance=25%, Case Code (Imperial)=0603, ComponentLink1Description=http://www.farnell.com/datasheets/1740433.pdf?src-supplier=Avnet, ComponentLink1URL=http://www.farnell.com/datasheets/1740433.pdf?src-supplier=Avnet, ComponentLink2Description=http://www.farnell.com/datasheets/1740433.pdf?src-supplier=Farnell, ComponentLink2URL=http://www.farnell.com/datasheets/1740433.pdf?src-supplier=Farnell, ComponentLink3Description=http://www.farnell.com/datasheets/1740433.pdf?src-supplier=Element14, ComponentLink3URL=http://www.farnell.com/datasheets/1740433.pdf?src-supplier=Element14, ComponentLink4Description=https://www.murata.com/en-us/products/productdata/8796738650142/ENFA0003.pdf?src-supplier=Digi-Key, ComponentLink4URL=https://www.murata.com/en-us/products/productdata/8796738650142/ENFA0003.pdf?src-supplier=Digi-Key, ComponentLink5Description=http://www.farnell.com/datasheets/1740433.pdf?src-supplier=Arrow, ComponentLink5URL=http://www.farnell.com/datasheets/1740433.pdf?src-supplier=Arrow, ComponentLink6Description=http://www.farnell.com/datasheets/1740433.pdf?src-supplier=Distrelec, ComponentLink6URL=http://www.farnell.com/datasheets/1740433.pdf?src-supplier=Distrelec, ComponentLink7Description=http://uk.rs-online.com/webdocs/13d6/0900766b813d688c.pdf?src-supplier=RSComponents, ComponentLink7URL=http://uk.rs-online.com/webdocs/13d6/0900766b813d688c.pdf?src-supplier=RSComponents, ComponentLink8Description=http://www.farnell.com/datasheets/1740433.pdf?src-supplier=Jameco, ComponentLink8URL=http://www.farnell.com/datasheets/1740433.pdf?src-supplier=Jameco, ComponentLink9Description=http://www.farnell.com/datasheets/1740433.pdf?src-supplier=Avnet+Europe, ComponentLink9URL=http://www.farnell.com/datasheets/1740433.pdf?src-supplier=Avnet+Europe, ComponentLink10Description=http://www.produktinfo.conrad.com/datenblaetter/425000-449999/442365-da-01-en-CHIP_DROSSEL_0603_120R_2000MA_1_6X0_8MM.pdf?src-supplier=Conrad, ComponentLink10URL=http://www.produktinfo.conrad.com/datenblaetter/425000-449999/442365-da-01-en-CHIP_DROSSEL_0603_120R_2000MA_1_6X0_8MM.pdf?src-supplier=Conrad, ComponentLink11Description=http://www.produktinfo.conrad.com/datenblaetter/1100000-1199999/001172297-da-01-en-DROSSEL_0603_120R_1_6X0_8MM_4000ST.pdf?src-supplier=Conrad, ComponentLink11URL=http://www.produktinfo.conrad.com/datenblaetter/1100000-1199999/001172297-da-01-en-DROSSEL_0603_120R_1_6X0_8MM_4000ST.pdf?src-supplier=Conrad, Core Material=Ferrite, DC Current=2A, Depth=0.8mm, Height=0.8mm, Impedance=120R, Lead Free="Lead Free", Length=1.6mm, Manufacturer Part Number=BLM18PG-121SN1D, Material=Ferrite,Steel, Max Current Rating=2A, Max DC Current=2A, Number of Circuits=1, Number of Lines=1, Number of Pins=2, Packaging="Tape and Reel", Pricing 1="1 = 0,10000, 10 = 0,07600, 25 = 0,06840, 50 = 0,05000, 100 = 0,04330, 250 = 0,03416, 500 = 0,02884, 1000 = 0,02429 (USD)", Radiation Hardening=No, REACH SVHC="No SVHC", RoHS=Yes, Shielding=Unshielded, Stock 1=1352097, Supplier 1=Digi-Key, Termination=SMD/SMT, Test Frequency=100MHz, Width=0.8mm
Fid1 Fid2: "Fiducial Mark", Part Number=Fid-Mark, Artikkelnr Noca=N.A., Artikkelnr Simpro=N.A., Footprint Doc=Fiducial, LatestRevisionDate=2009-12-12, Pin Count=1, Published=2009-12-12, Publisher="Nordic Semiconductor"
IC1: library part "MICROCHIP MIC5353", "Integrated Circuit", Manufacturer=Microchip, Supplier Part Number 1=576-3681-1-ND, ComponentLink1Description=http://www.farnell.com/datasheets/2245202.pdf?src-supplier=Farnell, ComponentLink1URL=http://www.farnell.com/datasheets/2245202.pdf?src-supplier=Farnell, ComponentLink2Description=http://www.microchip.com/mymicrochip/filehandler.aspx?ddocname=en579989&src-supplier=Digi-Key, ComponentLink2URL=http://www.microchip.com/mymicrochip/filehandler.aspx?ddocname=en579989&src-supplier=Digi-Key, ComponentLink3Description=http://www.farnell.com/datasheets/1692673.pdf?src-supplier=Element14, ComponentLink3URL=http://www.farnell.com/datasheets/1692673.pdf?src-supplier=Element14, ComponentLink4Description=https://datasheet.ciiva.com/2049/mic5353-2049344.pdf?src-supplier=Digi-Key, ComponentLink4URL=https://datasheet.ciiva.com/2049/mic5353-2049344.pdf?src-supplier=Digi-Key, ComponentLink5Description=https://datasheet.ciiva.com/2049/mic5353-2049342.pdf?src-supplier=Digi-Key, ComponentLink5URL=https://datasheet.ciiva.com/2049/mic5353-2049342.pdf?src-supplier=Digi-Key, ComponentLink6Description=https://datasheet.ciiva.com/2049/mic5353-2049343.pdf?src-supplier=Digi-Key, ComponentLink6URL=https://datasheet.ciiva.com/2049/mic5353-2049343.pdf?src-supplier=Digi-Key, Manufacturer Part Number=MIC5353YMT-TR, Pricing 1="1 = 0,34000, 25 = 0,28000, 100 = 0,26000 (USD)", RoHS=Yes, Stock 1=1004, Supplier 1=Digi-Key
IC2: library part "DIODES AP3012", "1.5MHz STEP-UP DC-DC CONVERTER", Case/Package=SOT-23-5, Manufacturer=Diodes, Max Input Voltage=16V, Max Operating Temperature=85°C, Max Output Current=500mA, Max Output Voltage=29V, Min Input Voltage=2.6V, Min Operating Temperature=-40°C, Min Output Voltage=1.25V, Min Supply Voltage=1V, Operating Supply Current=100nA, Package Quantity=3000, Supplier Part Number 1=AP3012KTR-G1DICT-ND, Switching Frequency=1.5MHz, ComponentLink1Description=https://datasheet.ciiva.com/29885/ap3012-29885792.pdf?src-supplier=Avnet, ComponentLink1URL=https://datasheet.ciiva.com/29885/ap3012-29885792.pdf?src-supplier=Avnet, ComponentLink2Description=https://datasheet.ciiva.com/29735/ap3012-29735077.pdf?src-supplier=Digi-Key, ComponentLink2URL=https://datasheet.ciiva.com/29735/ap3012-29735077.pdf?src-supplier=Digi-Key, ComponentLink3Description=https://datasheet.ciiva.com/29735/ap3012-29735068.pdf?src-supplier=Digi-Key, ComponentLink3URL=https://datasheet.ciiva.com/29735/ap3012-29735068.pdf?src-supplier=Digi-Key, Efficiency=85%, Lead Free="Lead Free", Manufacturer Part Number=AP3012KTR-G1, Mount="Surface Mount", Number of Outputs=1, Number of Pins=5, Operating Supply Voltage=16V, Output Configuration=Positive, Output Current=500mA, Output Type=Adjustable, Output Voltage=29V, Packaging="Tape and Reel", Pricing 1="1 = 0,47000, 10 = 0,38000, 25 = 0,34760, 100 = 0,23430, 250 = 0,19392, 500 = 0,17776, 1000 = 0,13332 (USD)", RoHS=Yes, Stock 1=30355, Supplier 1=Digi-Key, Synchronous Rectifier=No, Topology=Boost, Weight=0.001058oz
IC3: library part "DIODES AP3032", Case/Package=SOT-23-6, Frequency=1MHz, Manufacturer=Diodes, Max Input Voltage=9V, Max Operating Temperature=85°C, Max Output Voltage=38V, Min Input Voltage=2.7V, Min Operating Temperature=-40°C, Output Current per Channel=1.4A, Package Quantity=3000, Supplier Part Number 1=AP3032KTR-G1DICT-ND, Switching Frequency=750kHz, ComponentLink1Description=https://www.diodes.com/assets/Datasheets/AP3032.pdf?src-supplier=Digi-Key, ComponentLink1URL=https://www.diodes.com/assets/Datasheets/AP3032.pdf?src-supplier=Digi-Key, Dimming=PWM, Lead Free="Lead Free", Manufacturer Part Number=AP3032KTR-G1, Max Supply Voltage=9V, Mount="Surface Mount", Number of Channels=1, Number of Outputs=1, Number of Pins=6, Packaging="Tape and Reel", Pricing 1="1 = 0,48000, 10 = 0,36500, 100 = 0,22740, 500 = 0,15558, 1000 = 0,11968 (USD)", RoHS=Yes, Stock 1=8311, Supplier 1=Digi-Key, Topology=Boost, Weight=0.000529oz
J1: library part FPC-50, "Connector", Contact Resistance=30mR, Current Rating=500mA, Flammability Rating="UL94 V-0", Housing Color=Beige, Insulation Resistance=100MR, Manufacturer="Amphenol FCI", Max Operating Temperature=85°C, Max Voltage Rating (AC)=50V, Min Operating Temperature=-55°C, Package Quantity=2000, Supplier Part Number 1=609-1197-1-ND, Actuator Material=Glass,Thermoplastic, ComponentLink1Description=https://datasheet.ciiva.com/670/62684-670208.pdf?src-supplier=Digi-Key, ComponentLink1URL=https://datasheet.ciiva.com/670/62684-670208.pdf?src-supplier=Digi-Key, ComponentLink2Description=https://datasheet.ciiva.com/15176/getdatasheetpartid-175576-15176517.pdf?src-supplier=Verical, ComponentLink2URL=https://datasheet.ciiva.com/15176/getdatasheetpartid-175576-15176517.pdf?src-supplier=Verical, ComponentLink3Description=https://datasheet.ciiva.com/16660/62684-16660229.pdf?src-supplier=Avnet+Europe, ComponentLink3URL=https://datasheet.ciiva.com/16660/62684-16660229.pdf?src-supplier=Avnet+Europe, ComponentLink4Description=https://datasheet.ciiva.com/10367/62684-10367670.pdf?src-supplier=Avnet, ComponentLink4URL=https://datasheet.ciiva.com/10367/62684-10367670.pdf?src-supplier=Avnet, ComponentLink5Description=https://datasheet.ciiva.com/8038/62684-8038135.pdf?src-supplier=Element14, ComponentLink5URL=https://datasheet.ciiva.com/8038/62684-8038135.pdf?src-supplier=Element14, ComponentLink6Description=https://datasheet.ciiva.com/14640/70236842-14640812.pdf?src-supplier=Allied+Electronics, ComponentLink6URL=https://datasheet.ciiva.com/14640/70236842-14640812.pdf?src-supplier=Allied+Electronics, ComponentLink7Description=https://datasheet.ciiva.com/670/62684-670206.pdf?src-supplier=Digi-Key, ComponentLink7URL=https://datasheet.ciiva.com/670/62684-670206.pdf?src-supplier=Digi-Key, ComponentLink8Description=https://datasheet.ciiva.com/670/62684-670207.pdf?src-supplier=Digi-Key, ComponentLink8URL=https://datasheet.ciiva.com/670/62684-670207.pdf?src-supplier=Digi-Key, Contact Location=Bottom, Contact Material=Bronze, Contact Plating=Gold, Depth=5mm, Gender=Receptacle, Housing Material=Thermoplastic, Lead Free="Lead Free", Length=30.5mm, Manufacturer Part Number=62684-501100ALF, Max Voltage Rating (DC)=50V, Mount="Surface Mount", Number of Contacts=50, Number of Positions=50, Number of Rows=1, Orientation="Right Angle", Packaging="Tape and Reel", Pitch=0.5mm, Pricing 1="1 = 0,96000, 10 = 0,84700, 25 = 0,79680, 50 = 0,76360, 100 = 0,73040, 250 = 0,66396, 500 = 0,59756, 1000 = 0,53117 (USD)", Radiation Hardening=No, REACH SVHC="No SVHC", RoHS=Yes, Stock 1=6713, Supplier 1=Digi-Key, Termination=Solder, Voltage Rating=50V, Width=5mm
J2: library part FPC-40, "Connector", Contact Resistance=30mR, Current Rating=500mA, Flammability Rating="UL94 V-0", Housing Color=Beige, Insulation Resistance=100MR, Manufacturer="Amphenol FCI", Max Operating Temperature=85°C, Max Voltage Rating (AC)=50V, Min Operating Temperature=-55°C, Package Quantity=2000, Supplier Part Number 1=609-1195-1-ND, Actuator Material=Glass,Thermoplastic, ComponentLink1Description=https://datasheet.ciiva.com/25631/0900766b8118e51f-25631168.pdf?src-supplier=RSComponents, ComponentLink1URL=https://datasheet.ciiva.com/25631/0900766b8118e51f-25631168.pdf?src-supplier=RSComponents, ComponentLink2Description=https://datasheet.ciiva.com/3112/62684-3112007.pdf?src-supplier=Avnet, ComponentLink2URL=https://datasheet.ciiva.com/3112/62684-3112007.pdf?src-supplier=Avnet, ComponentLink3Description=https://datasheet.ciiva.com/670/62684-670200.pdf?src-supplier=Digi-Key, ComponentLink3URL=https://datasheet.ciiva.com/670/62684-670200.pdf?src-supplier=Digi-Key, ComponentLink4Description=https://datasheet.ciiva.com/670/62684-670201.pdf?src-supplier=Digi-Key, ComponentLink4URL=https://datasheet.ciiva.com/670/62684-670201.pdf?src-supplier=Digi-Key, ComponentLink5Description=https://datasheet.ciiva.com/670/62684-670202.pdf?src-supplier=Digi-Key, ComponentLink5URL=https://datasheet.ciiva.com/670/62684-670202.pdf?src-supplier=Digi-Key, ComponentLink6Description=https://datasheet.ciiva.com/16659/62684-16659882.pdf?src-supplier=Avnet+Europe, ComponentLink6URL=https://datasheet.ciiva.com/16659/62684-16659882.pdf?src-supplier=Avnet+Europe, ComponentLink7Description=https://datasheet.ciiva.com/16709/70236840-16709916.pdf?src-supplier=Allied+Electronics, ComponentLink7URL=https://datasheet.ciiva.com/16709/70236840-16709916.pdf?src-supplier=Allied+Electronics, ComponentLink8Description=https://datasheet.ciiva.com/3112/62684-3112397.pdf?src-supplier=Avnet, ComponentLink8URL=https://datasheet.ciiva.com/3112/62684-3112397.pdf?src-supplier=Avnet, ComponentLink9Description=https://datasheet.ciiva.com/5772/62684-5772782.pdf?src-supplier=Farnell, ComponentLink9URL=https://datasheet.ciiva.com/5772/62684-5772782.pdf?src-supplier=Farnell, Contact Location=Bottom, Contact Material=Bronze, Contact Plating=Gold, Depth=5mm, Gender=Receptacle, Housing Material=Thermoplastic, Lead Free="Lead Free", Length=25.5mm, Manufacturer Part Number=62684-401100ALF, Max Voltage Rating (DC)=50V, Mount="Surface Mount", Number of Contacts=40, Number of Positions=40, Number of Rows=1, Orientation="Right Angle", Packaging="Tape and Reel", Pitch=0.5mm, Pricing 1="1 = 0,97000, 10 = 0,85600, 25 = 0,80600, 50 = 0,77240, 100 = 0,73880, 250 = 0,67168, 500 = 0,60450, 1000 = 0,53733 (USD)", REACH SVHC="No SVHC", RoHS=Yes, Stock 1=13351, Supplier 1=Digi-Key, Termination=Solder, Voltage Rating=50V, Width=5mm
J6: library part "6 Pin", Contact Current Rating=500mA, Contact Resistance=35mR, Flammability Rating="UL94 V-0", Housing Color=Natural, Manufacturer="TE Connectivity", Max Operating Temperature=85°C, Max Voltage Rating (AC)=250V, Min Operating Temperature=-40°C, Package Quantity=2000, Supplier Part Number 1=A144895CT-ND, ComponentLink1Description=https://datasheet.ciiva.com/672/eng-cd-1734592-c-c-1734592-672627.pdf?src-supplier=Digi-Key, ComponentLink1URL=https://datasheet.ciiva.com/672/eng-cd-1734592-c-c-1734592-672627.pdf?src-supplier=Digi-Key, ComponentLink2Description=https://datasheet.ciiva.com/16658/eng-ds-1-1773440-6-0506-16658810.pdf?src-supplier=Avnet+Europe, ComponentLink2URL=https://datasheet.ciiva.com/16658/eng-ds-1-1773440-6-0506-16658810.pdf?src-supplier=Avnet+Europe, ComponentLink3Description=https://datasheet.ciiva.com/10366/eng-ds-1-1773440-6-0506-10366142.pdf?src-supplier=Avnet, ComponentLink3URL=https://datasheet.ciiva.com/10366/eng-ds-1-1773440-6-0506-10366142.pdf?src-supplier=Avnet, ComponentLink4Description=http://datasheet.octopart.com/1734592-6-TE-Connectivity-datasheet-502047.pdf?src-supplier=Newark, ComponentLink4URL=http://datasheet.octopart.com/1734592-6-TE-Connectivity-datasheet-502047.pdf?src-supplier=Newark, ComponentLink5Description=http://sigma.octopart.com/12115691/technical_drawing/TE-Connectivity-1734592-6.pdf?src-supplier=TE+Connectivity, ComponentLink5URL=http://sigma.octopart.com/12115691/technical_drawing/TE-Connectivity-1734592-6.pdf?src-supplier=TE+Connectivity, ComponentLink6Description=http://sigma.octopart.com/17020802/technical_drawing/TE-Connectivity-1734592-6.pdf?src-supplier=TE+Connectivity, ComponentLink6URL=http://sigma.octopart.com/17020802/technical_drawing/TE-Connectivity-1734592-6.pdf?src-supplier=TE+Connectivity, ComponentLink7Description=http://datasheet.octopart.com/1734592-6-TE-Connectivity---AMP-datasheet-13533107.pdf?src-supplier=TE+Connectivity, ComponentLink7URL=http://datasheet.octopart.com/1734592-6-TE-Connectivity---AMP-datasheet-13533107.pdf?src-supplier=TE+Connectivity, Connector System=Flex-to-Board, Connector Type=Receptacle, Contact Location=Bottom, Contact Material=Bronze, Contact Plating=Gold, Current Rating=500mA, Depth=5.1mm, ELV=Compliant, Gender=Female, Height=2.05mm, Housing Material=Polymer, Length=8.43mm, Manufacturer Part Number=1734592-6, Mating Alignment="Yes (With)", Mount="Surface Mount", Number of Contacts=6, Number of Positions=6, Number of Rows=1, Orientation="Right Angle", Packaging="Tape and Reel", PCB Mount Alignment="No (Without)", PCB Mounting Orientation="Right Angle", PCB Mount Retention=With, Pitch=0.5mm, Plating Thickness=0.025um, Pricing 1="1 = 0,44000, 10 = 0,41400, 25 = 0,37280, 50 = 0,33140, 100 = 0,31760, 250 = 0,28996, 500 = 0,27616, 1000 = 0,22783 (USD)", Radiation Hardening=No, Sealable="No (Without)", Shielding=Unshielded, Shrouded="Yes (With)", Stock 1=14000, Supplier 1=Digikey, Termination=SMD/SMT, Voltage Rating=250V, Width=5.1mm, Wire/Cable Type="Flat Flex"
L1: library part "Inductor Iron Core", Case/Package=1008, Case Code (Metric)=2520, Current Rating=900mA, DC Resistance (DCR)=172.9mR, Inductance Tolerance=20%, Manufacturer="Delta Electronics/Cyntec", Manufacturer Part Number=SDET25201T-100MS, Max Operating Temperature=105°C, Min Operating Temperature=-40°C, Package Quantity=1000, Self Resonant Frequency=23MHz, Supplier Part Number 1=2037-SDET25201T-100MSCT-ND, Test Frequency=100kHz, Case Code (Imperial)=1008, ComponentLink1Description=https://datasheet.ciiva.com/8001/1521599-8001889.pdf?src-supplier=Element14, ComponentLink1URL=https://datasheet.ciiva.com/8001/1521599-8001889.pdf?src-supplier=Element14, ComponentLink2Description=https://datasheet.ciiva.com/8001/1734578-8001891.pdf?src-supplier=Element14, ComponentLink2URL=https://datasheet.ciiva.com/8001/1734578-8001891.pdf?src-supplier=Element14, ComponentLink3Description=https://datasheet.ciiva.com/26871/getdatasheetpartid-638428-26871172.pdf?src-supplier=Verical, ComponentLink3URL=https://datasheet.ciiva.com/26871/getdatasheetpartid-638428-26871172.pdf?src-supplier=Verical, ComponentLink4Description=https://datasheet.ciiva.com/1040/cbc3225t100mr-ss-1040864.pdf?src-supplier=Digi-Key, ComponentLink4URL=https://datasheet.ciiva.com/1040/cbc3225t100mr-ss-1040864.pdf?src-supplier=Digi-Key, ComponentLink5Description=https://datasheet.ciiva.com/8498/cbc3225t100mr-ss-8498858.pdf?src-supplier=Avnet, ComponentLink5URL=https://datasheet.ciiva.com/8498/cbc3225t100mr-ss-8498858.pdf?src-supplier=Avnet, DC Current=900mA, Depth=2.7mm, Halogen Free="Halogen Free", Height=2.5mm, Height - Seated (Max)=0.106inch, Inductance=10uH, Lead Free="Lead Free", Length=3.4mm, Max DC Current=900mA, Military Standard=Not, Mount="Surface Mount", Number of Pins=2, Packaging="Tape and Reel", Pricing 1="1 = 0,26000, 10 = 0,23300, 100 = 0,16050, 500 = 0,13714 1000 = 0,10505 (USD)", Radiation Hardening=No, REACH SVHC=Unknown, RoHS=Yes, Saturation Current=900mA, Shielding=Unshielded, Stock 1=71037, Supplier 1=Digi-Key, Termination=SMD/SMT, Tolerance=20%, Width=0.098inch
L2: library part "Inductor Air Core", Case/Package=0805, Case Code (Metric)=2012, Current Rating=350mA, DC Resistance (DCR)=520mR, Manufacturer=TDK, Manufacturer Part Number=MLZ2012M6R8WT000, Max Operating Temperature=125°C, Min Operating Temperature=-55°C, Package Quantity=1, Saturation Current=220mA, Self Resonant Frequency=60MHz, Supplier Part Number 1=445-6402-1-ND, Test Frequency=2MHz, Tolerance=20%, Case Code (Imperial)=0805, ComponentLink1Description=https://product.tdk.com/info/en/catalog/datasheets/inductor_commercial_decoupling_mlz2012_en.pdf?src-supplier=Digi-Key, ComponentLink1URL=https://product.tdk.com/info/en/catalog/datasheets/inductor_commercial_decoupling_mlz2012_en.pdf?src-supplier=Digi-Key, Core Material=Ferrite, Height - Seated (Max)=0.057inch, Inductance=6.8uH, Length=0.079inch, Mount="Surface Mount", Packaging="Tape and Reel", Pricing 1="1 = 0,14000, 10 = 0,12900, 100 = 0,08630, 500 = 0,07188, 1000 = 0,06038 (USD)", RoHS=Yes, Shielding=Shielded, Stock 1=25001, Supplier 1=Digi-Key, Width=0.049inch
Logo1: library part Logo, "Schematic symbol for Logo"
R1 R8 R9 R10 R11 R12 R13 R19: library part Resistor_Chip, "Ceramic, SMT Capacitor", Case/Package=0603, Case Code (Metric)=1608, Manufacturer=Yageo, Manufacturer Part Number=RC0603FR-071KL, Max Operating Temperature=155°C, Min Operating Temperature=-55°C, Power Rating=100mW, Supplier Part Number 1=311-1.00KHRCT-ND, Temperature Coefficient=100ppm/°C, Tolerance=1%, Voltage Rating=50V, Case Code (Imperial)=0603, ComponentLink1Description=https://datasheet.ciiva.com/2469/esr-2469603.pdf?src-supplier=Digi-Key, ComponentLink1URL=https://datasheet.ciiva.com/2469/esr-2469603.pdf?src-supplier=Digi-Key, ComponentLink2Description=https://datasheet.ciiva.com/2469/esr-2469604.pdf?src-supplier=Digi-Key, ComponentLink2URL=https://datasheet.ciiva.com/2469/esr-2469604.pdf?src-supplier=Digi-Key, ComponentLink3Description=https://datasheet.ciiva.com/2469/esr-2469605.pdf?src-supplier=Digi-Key, ComponentLink3URL=https://datasheet.ciiva.com/2469/esr-2469605.pdf?src-supplier=Digi-Key, ComponentLink4Description=https://datasheet.ciiva.com/11808/0900766b80f96399-11808081.pdf?src-supplier=RSComponents, ComponentLink4URL=https://datasheet.ciiva.com/11808/0900766b80f96399-11808081.pdf?src-supplier=RSComponents, ComponentLink5Description=https://datasheet.ciiva.com/25906/pyu-rc0603-51-rohs-l-4-25906933.pdf?src-supplier=Avnet+Europe, ComponentLink5URL=https://datasheet.ciiva.com/25906/pyu-rc0603-51-rohs-l-4-25906933.pdf?src-supplier=Avnet+Europe, ComponentLink6Description=https://datasheet.ciiva.com/7660/1868787-7660790.pdf?src-supplier=Element14, ComponentLink6URL=https://datasheet.ciiva.com/7660/1868787-7660790.pdf?src-supplier=Element14, ComponentLink7Description=https://datasheet.ciiva.com/7746/1738695-7746279.pdf?src-supplier=Element14, ComponentLink7URL=https://datasheet.ciiva.com/7746/1738695-7746279.pdf?src-supplier=Element14, ComponentLink8Description=https://datasheet.ciiva.com/7746/1686128-7746280.pdf?src-supplier=Element14, ComponentLink8URL=https://datasheet.ciiva.com/7746/1686128-7746280.pdf?src-supplier=Element14, ComponentLink9Description=https://datasheet.ciiva.com/28386/pyu-rc0603-51-rohs-l-4-28386648.pdf?src-supplier=Avnet+Europe, ComponentLink9URL=https://datasheet.ciiva.com/28386/pyu-rc0603-51-rohs-l-4-28386648.pdf?src-supplier=Avnet+Europe, ComponentLink10Description=https://datasheet.ciiva.com/7746/1738695-7746281.pdf?src-supplier=Element14, ComponentLink10URL=https://datasheet.ciiva.com/7746/1738695-7746281.pdf?src-supplier=Element14, ComponentLink11Description=https://datasheet.ciiva.com/8896/pyu-rc0603-51-rohs-l-4-8896106.pdf?src-supplier=Avnet, ComponentLink11URL=https://datasheet.ciiva.com/8896/pyu-rc0603-51-rohs-l-4-8896106.pdf?src-supplier=Avnet, ComponentLink12Description=https://datasheet.ciiva.com/15189/getdatasheetpartid-404327-15189644.pdf?src-supplier=Verical, ComponentLink12URL=https://datasheet.ciiva.com/15189/getdatasheetpartid-404327-15189644.pdf?src-supplier=Verical, ComponentLink13Description=https://datasheet.ciiva.com/7983/443971-7983613.pdf?src-supplier=Element14, ComponentLink13URL=https://datasheet.ciiva.com/7983/443971-7983613.pdf?src-supplier=Element14, Composition="Thick Film", Contact Plating=Tin,Matte, Depth=0.8mm, Height=0.45mm, Lead Free="Lead Free", Length=1.6mm, Military Standard=Not, Packaging="Tape and Reel", Pricing 1="1 = 0,10000, 10 = 0,02300, 100 = 0,00940, 1000 = 0,00421, 2500 = 0,00366 (USD)", Radiation Hardening=No, REACH SVHC="No SVHC", Resistance=1kR, RoHS=Yes, Stock 1=20586953, Supplier 1=Digi-Key, Termination=SMD/SMT
  R12: NC=NC
R2: library part Resistor_Chip, "Ceramic, SMT Capacitor", Case/Package=0603, Case Code (Metric)=1608, Manufacturer=Yageo, Manufacturer Part Number=RC0603JR-0713KL, Max Operating Temperature=155°C, Min Operating Temperature=-55°C, Power Rating=100mW, Supplier Part Number 1=311-13KGRCT-ND, Temperature Coefficient=100ppm/°C, Tolerance=5%, Voltage Rating=75V, Voltage Rating (DC)=50V, Case Code (Imperial)=0603, ComponentLink1Description=https://datasheet.ciiva.com/8890/pyu-rc0603-51-rohs-l-4-8890984.pdf?src-supplier=Avnet, ComponentLink1URL=https://datasheet.ciiva.com/8890/pyu-rc0603-51-rohs-l-4-8890984.pdf?src-supplier=Avnet, ComponentLink2Description=https://datasheet.ciiva.com/12577/rc0603-272842-12577401.pdf?src-supplier=Mouser, ComponentLink2URL=https://datasheet.ciiva.com/12577/rc0603-272842-12577401.pdf?src-supplier=Mouser, Composition="Thick Film", Contact Plating=Tin,Matte, Depth=0.8mm, Height=0.45mm, Lead Free="Lead Free", Length=1.6mm, Military Standard=Not, Packaging="Tape and Reel", Pricing 1="1 = 0,10000, 10 = 0,01900, 100 = 0,00770, 1000 = 0,00347, 2500 = 0,00301 (USD)", Radiation Hardening=No, Resistance=13kR, RoHS=Yes, Stock 1=338462, Supplier 1=Digi-Key, Termination=SMD/SMT, Weight=7.1E-05oz, Width=0.8mm